# EAGLE board 3.3v_regMod_AAT1217_pnl (EAGLE 8.0.1)
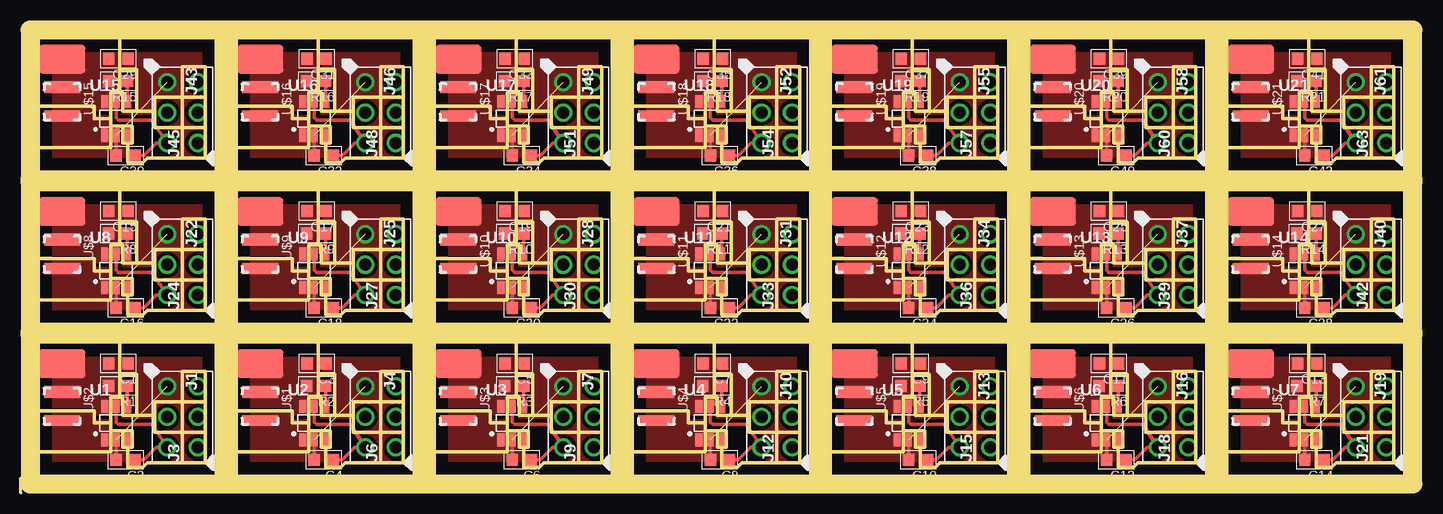
[diagram p0: board, top side]

Size 115.24 x 37.87 mm. Coordinates in mm from the lower left corner, seen from the top.
Outline: 0,0 16.18,0 16.18,12.47 0,12.47 0,0
Outline: 16.51,0 32.69,0 32.69,12.47 16.51,12.47 16.51,0
Outline: 33.02,0 49.2,0 49.2,12.47 33.02,12.47 33.02,0
Outline: 49.53,0 65.71,0 65.71,12.47 49.53,12.47 49.53,0
Outline: 66.04,0 82.22,0 82.22,12.47 66.04,12.47 66.04,0
Outline: 82.55,0 98.73,0 98.73,12.47 82.55,12.47 82.55,0
Outline: 99.06,0 115.24,0 115.24,12.47 99.06,12.47 99.06,0
Outline: 0,12.7 16.18,12.7 16.18,25.17 0,25.17 0,12.7
Outline: 16.51,12.7 32.69,12.7 32.69,25.17 16.51,25.17 16.51,12.7
Outline: 33.02,12.7 49.2,12.7 49.2,25.17 33.02,25.17 33.02,12.7
Outline: 49.53,12.7 65.71,12.7 65.71,25.17 49.53,25.17 49.53,12.7
Outline: 66.04,12.7 82.22,12.7 82.22,25.17 66.04,25.17 66.04,12.7
Outline: 82.55,12.7 98.73,12.7 98.73,25.17 82.55,25.17 82.55,12.7
Outline: 99.06,12.7 115.24,12.7 115.24,25.17 99.06,25.17 99.06,12.7
Outline: 0,25.4 16.18,25.4 16.18,37.87 0,37.87 0,25.4
Outline: 16.51,25.4 32.69,25.4 32.69,37.87 16.51,37.87 16.51,25.4
Outline: 33.02,25.4 49.2,25.4 49.2,37.87 33.02,37.87 33.02,25.4
Outline: 49.53,25.4 65.71,25.4 65.71,37.87 49.53,37.87 49.53,25.4
Outline: 66.04,25.4 82.22,25.4 82.22,37.87 66.04,37.87 66.04,25.4
Outline: 82.55,25.4 98.73,25.4 98.73,37.87 82.55,37.87 82.55,25.4
Outline: 99.06,25.4 115.24,25.4 115.24,37.87 99.06,37.87 99.06,25.4
Copper layers (1*16): Top 0.035mm / dielectric 1.5mm / Bottom 0.035mm
Design rules "default": minimum track width 10mil, minimum drill 24mil, track to track 8mil, track to pad 8mil, pad to pad 8mil, via to via 8mil, smd to smd 8mil, copper to edge 40mil, drill to drill 8mil, minimum pad ring 10mil, minimum via ring 8mil, stop-mask expansion 4mil, vias tented up to drill 0mil, thermal gap 10mil
Milling: 841 lines

## Footprints (pad centres in the part's own frame; a part is rotated, then mirrored left to right if it is on the bottom)
C0603-N = smd 0.95 x 1: 1 -0.8,0; 2 0.8,0
PTH_2.54MM_01X03 = drill 1: P$1 -2.54,0; P$2 0,0; P$3 2.54,0
1X01_LUXEON-PAD = smd 3.9 x 2.4: P$1 0,0
R0603-N = smd 0.95 x 1: 1 -0.8,0; 2 0.8,0
SOT23-6 = smd 0.6 x 1.1: 1 0,0; 2 0.95,0; 3 1.9,0; 4 1.9,2.8; 5 0.95,2.8; 6 0,2.8
L3030 = smd 1 x 3: P$1 -1.2,0 | smd 0.9 x 3: P$2 1.2,0

## Placement (x,y rotation side)
C1  [C0603-N]  7.37,10.06 180 top
C2  [C0603-N]  7.97,2 180 top
C3  [C0603-N]  23.88,10.06 180 top
C4  [C0603-N]  24.48,2 180 top
C5  [C0603-N]  40.39,10.06 180 top
C6  [C0603-N]  40.99,2 180 top
C7  [C0603-N]  56.9,10.06 180 top
C8  [C0603-N]  57.5,2 180 top
C9  [C0603-N]  73.41,10.06 180 top
C10  [C0603-N]  74.01,2 180 top
C11  [C0603-N]  89.92,10.06 180 top
C12  [C0603-N]  90.52,2 180 top
C13  [C0603-N]  106.43,10.06 180 top
C14  [C0603-N]  107.03,2 180 top
C15  [C0603-N]  7.37,22.76 180 top
C16  [C0603-N]  7.97,14.7 180 top
C17  [C0603-N]  23.88,22.76 180 top
C18  [C0603-N]  24.48,14.7 180 top
C19  [C0603-N]  40.39,22.76 180 top
C20  [C0603-N]  40.99,14.7 180 top
C21  [C0603-N]  56.9,22.76 180 top
C22  [C0603-N]  57.5,14.7 180 top
C23  [C0603-N]  73.41,22.76 180 top
C24  [C0603-N]  74.01,14.7 180 top
C25  [C0603-N]  89.92,22.76 180 top
C26  [C0603-N]  90.52,14.7 180 top
C27  [C0603-N]  106.43,22.76 180 top
C28  [C0603-N]  107.03,14.7 180 top
C29  [C0603-N]  7.37,35.46 180 top
C30  [C0603-N]  7.97,27.4 180 top
C31  [C0603-N]  23.88,35.46 180 top
C32  [C0603-N]  24.48,27.4 180 top
C33  [C0603-N]  40.39,35.46 180 top
C34  [C0603-N]  40.99,27.4 180 top
C35  [C0603-N]  56.9,35.46 180 top
C36  [C0603-N]  57.5,27.4 180 top
C37  [C0603-N]  73.41,35.46 180 top
C38  [C0603-N]  74.01,27.4 180 top
C39  [C0603-N]  89.92,35.46 180 top
C40  [C0603-N]  90.52,27.4 180 top
C41  [C0603-N]  106.43,35.46 180 top
C42  [C0603-N]  107.03,27.4 180 top
J1  MF-CON-2.54mm-01x03  [PTH_2.54MM_01X03]  11.43,5.59 270 top
J2  CON_01X01LUX  [1X01_LUXEON-PAD]  2.67,10.03 0 top
J3  MF-CON-2.54mm-01x03  [PTH_2.54MM_01X03]  13.97,5.59 90 top
J4  MF-CON-2.54mm-01x03  [PTH_2.54MM_01X03]  27.94,5.59 270 top
J5  CON_01X01LUX  [1X01_LUXEON-PAD]  19.18,10.03 0 top
J6  MF-CON-2.54mm-01x03  [PTH_2.54MM_01X03]  30.48,5.59 90 top
J7  MF-CON-2.54mm-01x03  [PTH_2.54MM_01X03]  44.45,5.59 270 top
J8  CON_01X01LUX  [1X01_LUXEON-PAD]  35.69,10.03 0 top
J9  MF-CON-2.54mm-01x03  [PTH_2.54MM_01X03]  46.99,5.59 90 top
J10  MF-CON-2.54mm-01x03  [PTH_2.54MM_01X03]  60.96,5.59 270 top
J11  CON_01X01LUX  [1X01_LUXEON-PAD]  52.2,10.03 0 top
J12  MF-CON-2.54mm-01x03  [PTH_2.54MM_01X03]  63.5,5.59 90 top
J13  MF-CON-2.54mm-01x03  [PTH_2.54MM_01X03]  77.47,5.59 270 top
J14  CON_01X01LUX  [1X01_LUXEON-PAD]  68.71,10.03 0 top
J15  MF-CON-2.54mm-01x03  [PTH_2.54MM_01X03]  80.01,5.59 90 top
J16  MF-CON-2.54mm-01x03  [PTH_2.54MM_01X03]  93.98,5.59 270 top
J17  CON_01X01LUX  [1X01_LUXEON-PAD]  85.22,10.03 0 top
J18  MF-CON-2.54mm-01x03  [PTH_2.54MM_01X03]  96.52,5.59 90 top
J19  MF-CON-2.54mm-01x03  [PTH_2.54MM_01X03]  110.49,5.59 270 top
J20  CON_01X01LUX  [1X01_LUXEON-PAD]  101.73,10.03 0 top
J21  MF-CON-2.54mm-01x03  [PTH_2.54MM_01X03]  113.03,5.59 90 top
J22  MF-CON-2.54mm-01x03  [PTH_2.54MM_01X03]  11.43,18.29 270 top
J23  CON_01X01LUX  [1X01_LUXEON-PAD]  2.67,22.73 0 top
J24  MF-CON-2.54mm-01x03  [PTH_2.54MM_01X03]  13.97,18.29 90 top
J25  MF-CON-2.54mm-01x03  [PTH_2.54MM_01X03]  27.94,18.29 270 top
J26  CON_01X01LUX  [1X01_LUXEON-PAD]  19.18,22.73 0 top
J27  MF-CON-2.54mm-01x03  [PTH_2.54MM_01X03]  30.48,18.29 90 top
J28  MF-CON-2.54mm-01x03  [PTH_2.54MM_01X03]  44.45,18.29 270 top
J29  CON_01X01LUX  [1X01_LUXEON-PAD]  35.69,22.73 0 top
J30  MF-CON-2.54mm-01x03  [PTH_2.54MM_01X03]  46.99,18.29 90 top
J31  MF-CON-2.54mm-01x03  [PTH_2.54MM_01X03]  60.96,18.29 270 top
J32  CON_01X01LUX  [1X01_LUXEON-PAD]  52.2,22.73 0 top
J33  MF-CON-2.54mm-01x03  [PTH_2.54MM_01X03]  63.5,18.29 90 top
J34  MF-CON-2.54mm-01x03  [PTH_2.54MM_01X03]  77.47,18.29 270 top
J35  CON_01X01LUX  [1X01_LUXEON-PAD]  68.71,22.73 0 top
J36  MF-CON-2.54mm-01x03  [PTH_2.54MM_01X03]  80.01,18.29 90 top
J37  MF-CON-2.54mm-01x03  [PTH_2.54MM_01X03]  93.98,18.29 270 top
J38  CON_01X01LUX  [1X01_LUXEON-PAD]  85.22,22.73 0 top
J39  MF-CON-2.54mm-01x03  [PTH_2.54MM_01X03]  96.52,18.29 90 top
J40  MF-CON-2.54mm-01x03  [PTH_2.54MM_01X03]  110.49,18.29 270 top
J41  CON_01X01LUX  [1X01_LUXEON-PAD]  101.73,22.73 0 top
J42  MF-CON-2.54mm-01x03  [PTH_2.54MM_01X03]  113.03,18.29 90 top
J43  MF-CON-2.54mm-01x03  [PTH_2.54MM_01X03]  11.43,30.99 270 top
J44  CON_01X01LUX  [1X01_LUXEON-PAD]  2.67,35.43 0 top
J45  MF-CON-2.54mm-01x03  [PTH_2.54MM_01X03]  13.97,30.99 90 top
J46  MF-CON-2.54mm-01x03  [PTH_2.54MM_01X03]  27.94,30.99 270 top
J47  CON_01X01LUX  [1X01_LUXEON-PAD]  19.18,35.43 0 top
J48  MF-CON-2.54mm-01x03  [PTH_2.54MM_01X03]  30.48,30.99 90 top
J49  MF-CON-2.54mm-01x03  [PTH_2.54MM_01X03]  44.45,30.99 270 top
J50  CON_01X01LUX  [1X01_LUXEON-PAD]  35.69,35.43 0 top
J51  MF-CON-2.54mm-01x03  [PTH_2.54MM_01X03]  46.99,30.99 90 top
J52  MF-CON-2.54mm-01x03  [PTH_2.54MM_01X03]  60.96,30.99 270 top
J53  CON_01X01LUX  [1X01_LUXEON-PAD]  52.2,35.43 0 top
J54  MF-CON-2.54mm-01x03  [PTH_2.54MM_01X03]  63.5,30.99 90 top
J55  MF-CON-2.54mm-01x03  [PTH_2.54MM_01X03]  77.47,30.99 270 top
J56  CON_01X01LUX  [1X01_LUXEON-PAD]  68.71,35.43 0 top
J57  MF-CON-2.54mm-01x03  [PTH_2.54MM_01X03]  80.01,30.99 90 top
J58  MF-CON-2.54mm-01x03  [PTH_2.54MM_01X03]  93.98,30.99 270 top
J59  CON_01X01LUX  [1X01_LUXEON-PAD]  85.22,35.43 0 top
J60  MF-CON-2.54mm-01x03  [PTH_2.54MM_01X03]  96.52,30.99 90 top
J61  MF-CON-2.54mm-01x03  [PTH_2.54MM_01X03]  110.49,30.99 270 top
J62  CON_01X01LUX  [1X01_LUXEON-PAD]  101.73,35.43 0 top
J63  MF-CON-2.54mm-01x03  [PTH_2.54MM_01X03]  113.03,30.99 90 top
R1  1M  [R0603-N]  7.33,8.19 180 top
R2  1M  [R0603-N]  23.84,8.19 180 top
R3  1M  [R0603-N]  40.35,8.19 180 top
R4  1M  [R0603-N]  56.86,8.19 180 top
R5  1M  [R0603-N]  73.37,8.19 180 top
R6  1M  [R0603-N]  89.88,8.19 180 top
R7  1M  [R0603-N]  106.39,8.19 180 top
R8  1M  [R0603-N]  7.33,20.89 180 top
R9  1M  [R0603-N]  23.84,20.89 180 top
R10  1M  [R0603-N]  40.35,20.89 180 top
R11  1M  [R0603-N]  56.86,20.89 180 top
R12  1M  [R0603-N]  73.37,20.89 180 top
R13  1M  [R0603-N]  89.88,20.89 180 top
R14  1M  [R0603-N]  106.39,20.89 180 top
R15  1M  [R0603-N]  7.33,33.59 180 top
R16  1M  [R0603-N]  23.84,33.59 180 top
R17  1M  [R0603-N]  40.35,33.59 180 top
R18  1M  [R0603-N]  56.86,33.59 180 top
R19  1M  [R0603-N]  73.37,33.59 180 top
R20  1M  [R0603-N]  89.88,33.59 180 top
R21  1M  [R0603-N]  106.39,33.59 180 top
U1  AAT1217-SOT23-6  [SOT23-6]  6.22,3.68 0 top
U2  AAT1217-SOT23-6  [SOT23-6]  22.73,3.68 0 top
U3  AAT1217-SOT23-6  [SOT23-6]  39.24,3.68 0 top
U4  AAT1217-SOT23-6  [SOT23-6]  55.75,3.68 0 top
U5  AAT1217-SOT23-6  [SOT23-6]  72.26,3.68 0 top
U6  AAT1217-SOT23-6  [SOT23-6]  88.77,3.68 0 top
U7  AAT1217-SOT23-6  [SOT23-6]  105.28,3.68 0 top
U8  AAT1217-SOT23-6  [SOT23-6]  6.22,16.38 0 top
U9  AAT1217-SOT23-6  [SOT23-6]  22.73,16.38 0 top
U10  AAT1217-SOT23-6  [SOT23-6]  39.24,16.38 0 top
U11  AAT1217-SOT23-6  [SOT23-6]  55.75,16.38 0 top
U12  AAT1217-SOT23-6  [SOT23-6]  72.26,16.38 0 top
U13  AAT1217-SOT23-6  [SOT23-6]  88.77,16.38 0 top
U14  AAT1217-SOT23-6  [SOT23-6]  105.28,16.38 0 top
U15  AAT1217-SOT23-6  [SOT23-6]  6.22,29.08 0 top
U16  AAT1217-SOT23-6  [SOT23-6]  22.73,29.08 0 top
U17  AAT1217-SOT23-6  [SOT23-6]  39.24,29.08 0 top
U18  AAT1217-SOT23-6  [SOT23-6]  55.75,29.08 0 top
U19  AAT1217-SOT23-6  [SOT23-6]  72.26,29.08 0 top
U20  AAT1217-SOT23-6  [SOT23-6]  88.77,29.08 0 top
U21  AAT1217-SOT23-6  [SOT23-6]  105.28,29.08 0 top
U$1  [L3030]  19.18,6.48 270 top
U$2  [L3030]  2.67,6.48 270 top
U$3  [L3030]  35.69,6.48 270 top
U$4  [L3030]  52.2,6.48 270 top
U$5  [L3030]  68.71,6.48 270 top
U$6  [L3030]  85.22,6.48 270 top
U$7  [L3030]  101.73,6.48 270 top
U$8  [L3030]  2.67,19.18 270 top
U$9  [L3030]  19.18,19.18 270 top
U$10  [L3030]  35.69,19.18 270 top
U$11  [L3030]  52.2,19.18 270 top
U$12  [L3030]  68.71,19.18 270 top
U$13  [L3030]  85.22,19.18 270 top
U$14  [L3030]  101.73,19.18 270 top
U$15  [L3030]  2.67,31.88 270 top
U$16  [L3030]  19.18,31.88 270 top
U$17  [L3030]  35.69,31.88 270 top
U$18  [L3030]  52.2,31.88 270 top
U$19  [L3030]  68.71,31.88 270 top
U$20  [L3030]  85.22,31.88 270 top
U$21  [L3030]  101.73,31.88 270 top

## Library data of the parts
C1-C42 R1-R21 U$1-U$21 = My_Passives
J1 J3 J4 J6 J7 J9 J10 J12 J13 J15 J16 J18 J19 J21 J22 J24 J25 J27 J28 J30 J31 J33 J34 J36 J37 J39 J40 J42 J43 J45 J46 J48 J49 J51 J52 J54 J55 J57 J58 J60 J61 J63 = My_Connectors; HOUSEPART: YES; MPN: MF-CON-2.54mm-01x03; POPULATE: 1; URL: https://factory.macrofab.com/part/MF-CON-2.54mm-01x03
J2 J5 J8 J11 J14 J17 J20 J23 J26 J29 J32 J35 J38 J41 J44 J47 J50 J53 J56 J59 J62 = My_Connectors
U1-U21 = My_IC_Power; PARTNO: AAT1217ICA-3.3-T1

## Nets
3V1: C4.1 J4.P$3 U2.5
3V2: C6.1 J7.P$3 U3.5
3V3: C2.1 J1.P$3 U1.5
3V4: C8.1 J10.P$3 U4.5
3V5: C10.1 J13.P$3 U5.5
3V6: C12.1 J16.P$3 U6.5
3V7: C14.1 J19.P$3 U7.5
3V8: C16.1 J22.P$3 U8.5
3V9: C18.1 J25.P$3 U9.5
3V10: C20.1 J28.P$3 U10.5
3V11: C22.1 J31.P$3 U11.5
3V12: C24.1 J34.P$3 U12.5
3V13: C26.1 J37.P$3 U13.5
3V14: C28.1 J40.P$3 U14.5
3V15: C30.1 J43.P$3 U15.5
3V16: C32.1 J46.P$3 U16.5
3V17: C34.1 J49.P$3 U17.5
3V18: C36.1 J52.P$3 U18.5
3V19: C38.1 J55.P$3 U19.5
3V20: C40.1 J58.P$3 U20.5
3V21: C42.1 J61.P$3 U21.5
GND: C1.1 C2.2 J1.P$1 U1.2
GND1: C3.1 C4.2 J4.P$1 U2.2
GND2: C5.1 C6.2 J7.P$1 U3.2
GND3: C7.1 C8.2 J10.P$1 U4.2
GND4: C9.1 C10.2 J13.P$1 U5.2
GND5: C11.1 C12.2 J16.P$1 U6.2
GND6: C13.1 C14.2 J19.P$1 U7.2
GND7: C15.1 C16.2 J22.P$1 U8.2
GND8: C17.1 C18.2 J25.P$1 U9.2
GND9: C19.1 C20.2 J28.P$1 U10.2
GND10: C21.1 C22.2 J31.P$1 U11.2
GND11: C23.1 C24.2 J34.P$1 U12.2
GND12: C25.1 C26.2 J37.P$1 U13.2
GND13: C27.1 C28.2 J40.P$1 U14.2
GND14: C29.1 C30.2 J43.P$1 U15.2
GND15: C31.1 C32.2 J46.P$1 U16.2
GND16: C33.1 C34.2 J49.P$1 U17.2
GND17: C35.1 C36.2 J52.P$1 U18.2
GND18: C37.1 C38.2 J55.P$1 U19.2
GND19: C39.1 C40.2 J58.P$1 U20.2
GND20: C41.1 C42.2 J61.P$1 U21.2
N$1: U1.1 U$2.P$2
N$2: U2.1 U$1.P$2
N$3: R1.1 U1.4
N$4: R2.1 U2.4
N$5: U3.1 U$3.P$2
N$6: R3.1 U3.4
N$7: U4.1 U$4.P$2
N$8: R4.1 U4.4
N$9: U5.1 U$5.P$2
N$10: R5.1 U5.4
N$11: U6.1 U$6.P$2
N$12: R6.1 U6.4
N$13: U7.1 U$7.P$2
N$14: R7.1 U7.4
N$15: U8.1 U$8.P$2
N$16: R8.1 U8.4
N$17: U9.1 U$9.P$2
N$18: R9.1 U9.4
N$19: U10.1 U$10.P$2
N$20: R10.1 U10.4
N$21: U11.1 U$11.P$2
N$22: R11.1 U11.4
N$23: U12.1 U$12.P$2
N$24: R12.1 U12.4
N$25: U13.1 U$13.P$2
N$26: R13.1 U13.4
N$27: U14.1 U$14.P$2
N$28: R14.1 U14.4
N$29: U15.1 U$15.P$2
N$30: R15.1 U15.4
N$31: U16.1 U$16.P$2
N$32: R16.1 U16.4
N$33: U17.1 U$17.P$2
N$34: R17.1 U17.4
N$35: U18.1 U$18.P$2
N$36: R18.1 U18.4
N$37: U19.1 U$19.P$2
N$38: R19.1 U19.4
N$39: U20.1 U$20.P$2
N$40: R20.1 U20.4
N$41: U21.1 U$21.P$2
N$42: R21.1 U21.4
V_BAT: C1.2 J2.P$1 R1.2 U1.6 U$2.P$1
V_BAT1: C3.2 J5.P$1 R2.2 U2.6 U$1.P$1
V_BAT2: C5.2 J8.P$1 R3.2 U3.6 U$3.P$1
V_BAT3: C7.2 J11.P$1 R4.2 U4.6 U$4.P$1
V_BAT4: C9.2 J14.P$1 R5.2 U5.6 U$5.P$1
V_BAT5: C11.2 J17.P$1 R6.2 U6.6 U$6.P$1
V_BAT6: C13.2 J20.P$1 R7.2 U7.6 U$7.P$1
V_BAT7: C15.2 J23.P$1 R8.2 U8.6 U$8.P$1
V_BAT8: C17.2 J26.P$1 R9.2 U9.6 U$9.P$1
V_BAT9: C19.2 J29.P$1 R10.2 U10.6 U$10.P$1
V_BAT10: C21.2 J32.P$1 R11.2 U11.6 U$11.P$1
V_BAT11: C23.2 J35.P$1 R12.2 U12.6 U$12.P$1
V_BAT12: C25.2 J38.P$1 R13.2 U13.6 U$13.P$1
V_BAT13: C27.2 J41.P$1 R14.2 U14.6 U$14.P$1
V_BAT14: C29.2 J44.P$1 R15.2 U15.6 U$15.P$1
V_BAT15: C31.2 J47.P$1 R16.2 U16.6 U$16.P$1
V_BAT16: C33.2 J50.P$1 R17.2 U17.6 U$17.P$1
V_BAT17: C35.2 J53.P$1 R18.2 U18.6 U$18.P$1
V_BAT18: C37.2 J56.P$1 R19.2 U19.6 U$19.P$1
V_BAT19: C39.2 J59.P$1 R20.2 U20.6 U$20.P$1
V_BAT20: C41.2 J62.P$1 R21.2 U21.6 U$21.P$1

## Tracks (layer width: path | path; a pad name or v marks a point on that pad's centre or on a via)
3V1
  Top 0.305: U2.5 23.68,5.15 23.88,4.95 26.67,4.95 J4.P$3 27.05,3.05 26,2 C4.1
3V2
  Top 0.305: U3.5 40.19,5.15 40.39,4.95 43.18,4.95 J7.P$3 43.56,3.05 42.51,2 C6.1
3V3
  Top 0.305: U1.5 7.17,5.15 7.37,4.95 10.16,4.95 J1.P$3 10.54,3.05 9.49,2 C2.1
3V4
  Top 0.305: U4.5 56.7,5.15 56.9,4.95 59.69,4.95 J10.P$3 60.07,3.05 59.02,2 C8.1
3V5
  Top 0.305: U5.5 73.21,5.15 73.41,4.95 76.2,4.95 J13.P$3 76.58,3.05 75.53,2 C10.1
3V6
  Top 0.305: U6.5 89.72,5.15 89.92,4.95 92.71,4.95 J16.P$3 93.09,3.05 92.04,2 C12.1
3V7
  Top 0.305: U7.5 106.23,5.15 106.43,4.95 109.22,4.95 J19.P$3 109.6,3.05 108.55,2 C14.1
3V8
  Top 0.305: U8.5 7.17,17.85 7.37,17.65 10.16,17.65 J22.P$3 10.54,15.75 9.49,14.7 C16.1
3V9
  Top 0.305: U9.5 23.68,17.85 23.88,17.65 26.67,17.65 J25.P$3 27.05,15.75 26,14.7 C18.1
3V10
  Top 0.305: U10.5 40.19,17.85 40.39,17.65 43.18,17.65 J28.P$3 43.56,15.75 42.51,14.7 C20.1
3V11
  Top 0.305: U11.5 56.7,17.85 56.9,17.65 59.69,17.65 J31.P$3 60.07,15.75 59.02,14.7 C22.1
3V12
  Top 0.305: U12.5 73.21,17.85 73.41,17.65 76.2,17.65 J34.P$3 76.58,15.75 75.53,14.7 C24.1
3V13
  Top 0.305: U13.5 89.72,17.85 89.92,17.65 92.71,17.65 J37.P$3 93.09,15.75 92.04,14.7 C26.1
3V14
  Top 0.305: U14.5 106.23,17.85 106.43,17.65 109.22,17.65 J40.P$3 109.6,15.75 108.55,14.7 C28.1
3V15
  Top 0.305: U15.5 7.17,30.55 7.37,30.35 10.16,30.35 J43.P$3 10.54,28.45 9.49,27.4 C30.1
3V16
  Top 0.305: U16.5 23.68,30.55 23.88,30.35 26.67,30.35 J46.P$3 27.05,28.45 26,27.4 C32.1
3V17
  Top 0.305: U17.5 40.19,30.55 40.39,30.35 43.18,30.35 J49.P$3 43.56,28.45 42.51,27.4 C34.1
3V18
  Top 0.305: U18.5 56.7,30.55 56.9,30.35 59.69,30.35 J52.P$3 60.07,28.45 59.02,27.4 C36.1
3V19
  Top 0.305: U19.5 73.21,30.55 73.41,30.35 76.2,30.35 J55.P$3 76.58,28.45 75.53,27.4 C38.1
3V20
  Top 0.305: U20.5 89.72,30.55 89.92,30.35 92.71,30.35 J58.P$3 93.09,28.45 92.04,27.4 C40.1
3V21
  Top 0.305: U21.5 106.23,30.55 106.43,30.35 109.22,30.35 J61.P$3 109.6,28.45 108.55,27.4 C42.1
GND  (1 unrouted)
  Top 0.305: U1.2 C2.2
  pour Top (isolate 0.305, rank 6, no thermals): 0.51,0.51 15.37,0.51 15.37,11.43 0.51,11.43
GND1  (1 unrouted)
  Top 0.305: U2.2 C4.2
  pour Top (isolate 0.305, rank 6, no thermals): 17.02,0.51 31.88,0.51 31.88,11.43 17.02,11.43
GND2  (1 unrouted)
  Top 0.305: U3.2 C6.2
  pour Top (isolate 0.305, rank 6, no thermals): 33.53,0.51 48.39,0.51 48.39,11.43 33.53,11.43
GND3  (1 unrouted)
  Top 0.305: U4.2 C8.2
  pour Top (isolate 0.305, rank 6, no thermals): 50.04,0.51 64.9,0.51 64.9,11.43 50.04,11.43
GND4  (1 unrouted)
  Top 0.305: U5.2 C10.2
  pour Top (isolate 0.305, rank 6, no thermals): 66.55,0.51 81.41,0.51 81.41,11.43 66.55,11.43
GND5  (1 unrouted)
  Top 0.305: U6.2 C12.2
  pour Top (isolate 0.305, rank 6, no thermals): 83.06,0.51 97.92,0.51 97.92,11.43 83.06,11.43
GND6  (1 unrouted)
  Top 0.305: U7.2 C14.2
  pour Top (isolate 0.305, rank 6, no thermals): 99.57,0.51 114.43,0.51 114.43,11.43 99.57,11.43
GND7  (1 unrouted)
  Top 0.305: U8.2 C16.2
  pour Top (isolate 0.305, rank 6, no thermals): 0.51,13.21 15.37,13.21 15.37,24.13 0.51,24.13
GND8  (1 unrouted)
  Top 0.305: U9.2 C18.2
  pour Top (isolate 0.305, rank 6, no thermals): 17.02,13.21 31.88,13.21 31.88,24.13 17.02,24.13
GND9  (1 unrouted)
  Top 0.305: U10.2 C20.2
  pour Top (isolate 0.305, rank 6, no thermals): 33.53,13.21 48.39,13.21 48.39,24.13 33.53,24.13
GND10  (1 unrouted)
  Top 0.305: U11.2 C22.2
  pour Top (isolate 0.305, rank 6, no thermals): 50.04,13.21 64.9,13.21 64.9,24.13 50.04,24.13
GND11  (1 unrouted)
  Top 0.305: U12.2 C24.2
  pour Top (isolate 0.305, rank 6, no thermals): 66.55,13.21 81.41,13.21 81.41,24.13 66.55,24.13
GND12  (1 unrouted)
  Top 0.305: U13.2 C26.2
  pour Top (isolate 0.305, rank 6, no thermals): 83.06,13.21 97.92,13.21 97.92,24.13 83.06,24.13
GND13  (1 unrouted)
  Top 0.305: U14.2 C28.2
  pour Top (isolate 0.305, rank 6, no thermals): 99.57,13.21 114.43,13.21 114.43,24.13 99.57,24.13
GND14  (1 unrouted)
  Top 0.305: U15.2 C30.2
  pour Top (isolate 0.305, rank 6, no thermals): 0.51,25.91 15.37,25.91 15.37,36.83 0.51,36.83
GND15  (1 unrouted)
  Top 0.305: U16.2 C32.2
  pour Top (isolate 0.305, rank 6, no thermals): 17.02,25.91 31.88,25.91 31.88,36.83 17.02,36.83
GND16  (1 unrouted)
  Top 0.305: U17.2 C34.2
  pour Top (isolate 0.305, rank 6, no thermals): 33.53,25.91 48.39,25.91 48.39,36.83 33.53,36.83
GND17  (1 unrouted)
  Top 0.305: U18.2 C36.2
  pour Top (isolate 0.305, rank 6, no thermals): 50.04,25.91 64.9,25.91 64.9,36.83 50.04,36.83
GND18  (1 unrouted)
  Top 0.305: U19.2 C38.2
  pour Top (isolate 0.305, rank 6, no thermals): 66.55,25.91 81.41,25.91 81.41,36.83 66.55,36.83
GND19  (1 unrouted)
  Top 0.305: U20.2 C40.2
  pour Top (isolate 0.305, rank 6, no thermals): 83.06,25.91 97.92,25.91 97.92,36.83 83.06,36.83
GND20  (1 unrouted)
  Top 0.305: U21.2 C42.2
  pour Top (isolate 0.305, rank 6, no thermals): 99.57,25.91 114.43,25.91 114.43,36.83 99.57,36.83
N$1
  pour Top (isolate 0.305, rank 2, no thermals): 0.51,6.22 6.73,6.22 6.73,2.92 0.51,2.92
N$2
  pour Top (isolate 0.305, rank 2, no thermals): 17.02,6.22 23.24,6.22 23.24,2.92 17.02,2.92
N$3
  Top 0.305: U1.4 8.12,8.18 R1.1
N$4
  Top 0.305: U2.4 24.63,8.18 R2.1
N$5
  pour Top (isolate 0.305, rank 2, no thermals): 33.53,6.22 39.75,6.22 39.75,2.92 33.53,2.92
N$6
  Top 0.305: U3.4 41.14,8.18 R3.1
N$7
  pour Top (isolate 0.305, rank 2, no thermals): 50.04,6.22 56.26,6.22 56.26,2.92 50.04,2.92
N$8
  Top 0.305: U4.4 57.65,8.18 R4.1
N$9
  pour Top (isolate 0.305, rank 2, no thermals): 66.55,6.22 72.77,6.22 72.77,2.92 66.55,2.92
N$10
  Top 0.305: U5.4 74.16,8.18 R5.1
N$11
  pour Top (isolate 0.305, rank 2, no thermals): 83.06,6.22 89.28,6.22 89.28,2.92 83.06,2.92
N$12
  Top 0.305: U6.4 90.67,8.18 R6.1
N$13
  pour Top (isolate 0.305, rank 2, no thermals): 99.57,6.22 105.79,6.22 105.79,2.92 99.57,2.92
N$14
  Top 0.305: U7.4 107.18,8.18 R7.1
N$15
  pour Top (isolate 0.305, rank 2, no thermals): 0.51,18.92 6.73,18.92 6.73,15.62 0.51,15.62
N$16
  Top 0.305: U8.4 8.12,20.88 R8.1
N$17
  pour Top (isolate 0.305, rank 2, no thermals): 17.02,18.92 23.24,18.92 23.24,15.62 17.02,15.62
N$18
  Top 0.305: U9.4 24.63,20.88 R9.1
N$19
  pour Top (isolate 0.305, rank 2, no thermals): 33.53,18.92 39.75,18.92 39.75,15.62 33.53,15.62
N$20
  Top 0.305: U10.4 41.14,20.88 R10.1
N$21
  pour Top (isolate 0.305, rank 2, no thermals): 50.04,18.92 56.26,18.92 56.26,15.62 50.04,15.62
N$22
  Top 0.305: U11.4 57.65,20.88 R11.1
N$23
  pour Top (isolate 0.305, rank 2, no thermals): 66.55,18.92 72.77,18.92 72.77,15.62 66.55,15.62
N$24
  Top 0.305: U12.4 74.16,20.88 R12.1
N$25
  pour Top (isolate 0.305, rank 2, no thermals): 83.06,18.92 89.28,18.92 89.28,15.62 83.06,15.62
N$26
  Top 0.305: U13.4 90.67,20.88 R13.1
N$27
  pour Top (isolate 0.305, rank 2, no thermals): 99.57,18.92 105.79,18.92 105.79,15.62 99.57,15.62
N$28
  Top 0.305: U14.4 107.18,20.88 R14.1
N$29
  pour Top (isolate 0.305, rank 2, no thermals): 0.51,31.62 6.73,31.62 6.73,28.32 0.51,28.32
N$30
  Top 0.305: U15.4 8.12,33.58 R15.1
N$31
  pour Top (isolate 0.305, rank 2, no thermals): 17.02,31.62 23.24,31.62 23.24,28.32 17.02,28.32
N$32
  Top 0.305: U16.4 24.63,33.58 R16.1
N$33
  pour Top (isolate 0.305, rank 2, no thermals): 33.53,31.62 39.75,31.62 39.75,28.32 33.53,28.32
N$34
  Top 0.305: U17.4 41.14,33.58 R17.1
N$35
  pour Top (isolate 0.305, rank 2, no thermals): 50.04,31.62 56.26,31.62 56.26,28.32 50.04,28.32
N$36
  Top 0.305: U18.4 57.65,33.58 R18.1
N$37
  pour Top (isolate 0.305, rank 2, no thermals): 66.55,31.62 72.77,31.62 72.77,28.32 66.55,28.32
N$38
  Top 0.305: U19.4 74.16,33.58 R19.1
N$39
  pour Top (isolate 0.305, rank 2, no thermals): 83.06,31.62 89.28,31.62 89.28,28.32 83.06,28.32
N$40
  Top 0.305: U20.4 90.67,33.58 R20.1
N$41
  pour Top (isolate 0.305, rank 2, no thermals): 99.57,31.62 105.79,31.62 105.79,28.32 99.57,28.32
N$42
  Top 0.305: U21.4 107.18,33.58 R21.1
V_BAT
  pour Top (isolate 0.305, no thermals): 0.51,11.43 0.51,6.48 5.59,6.48 5.59,5.84 6.6,5.84 6.6,7.24 7.37,7.24 7.37,11.43
V_BAT1
  pour Top (isolate 0.305, no thermals): 17.02,11.43 17.02,6.48 22.1,6.48 22.1,5.84 23.11,5.84 23.11,7.24 23.88,7.24 23.88,11.43
V_BAT2
  pour Top (isolate 0.305, no thermals): 33.53,11.43 33.53,6.48 38.61,6.48 38.61,5.84 39.62,5.84 39.62,7.24 40.39,7.24 40.39,11.43
V_BAT3
  pour Top (isolate 0.305, no thermals): 50.04,11.43 50.04,6.48 55.12,6.48 55.12,5.84 56.13,5.84 56.13,7.24 56.9,7.24 56.9,11.43
V_BAT4
  pour Top (isolate 0.305, no thermals): 66.55,11.43 66.55,6.48 71.63,6.48 71.63,5.84 72.64,5.84 72.64,7.24 73.41,7.24 73.41,11.43
V_BAT5
  pour Top (isolate 0.305, no thermals): 83.06,11.43 83.06,6.48 88.14,6.48 88.14,5.84 89.15,5.84 89.15,7.24 89.92,7.24 89.92,11.43
V_BAT6
  pour Top (isolate 0.305, no thermals): 99.57,11.43 99.57,6.48 104.65,6.48 104.65,5.84 105.66,5.84 105.66,7.24 106.43,7.24 106.43,11.43
V_BAT7
  pour Top (isolate 0.305, no thermals): 0.51,24.13 0.51,19.18 5.59,19.18 5.59,18.54 6.6,18.54 6.6,19.94 7.37,19.94 7.37,24.13
V_BAT8
  pour Top (isolate 0.305, no thermals): 17.02,24.13 17.02,19.18 22.1,19.18 22.1,18.54 23.11,18.54 23.11,19.94 23.88,19.94 23.88,24.13
V_BAT9
  pour Top (isolate 0.305, no thermals): 33.53,24.13 33.53,19.18 38.61,19.18 38.61,18.54 39.62,18.54 39.62,19.94 40.39,19.94 40.39,24.13
V_BAT10
  pour Top (isolate 0.305, no thermals): 50.04,24.13 50.04,19.18 55.12,19.18 55.12,18.54 56.13,18.54 56.13,19.94 56.9,19.94 56.9,24.13
V_BAT11
  pour Top (isolate 0.305, no thermals): 66.55,24.13 66.55,19.18 71.63,19.18 71.63,18.54 72.64,18.54 72.64,19.94 73.41,19.94 73.41,24.13
V_BAT12
  pour Top (isolate 0.305, no thermals): 83.06,24.13 83.06,19.18 88.14,19.18 88.14,18.54 89.15,18.54 89.15,19.94 89.92,19.94 89.92,24.13
V_BAT13
  pour Top (isolate 0.305, no thermals): 99.57,24.13 99.57,19.18 104.65,19.18 104.65,18.54 105.66,18.54 105.66,19.94 106.43,19.94 106.43,24.13
V_BAT14
  pour Top (isolate 0.305, no thermals): 0.51,36.83 0.51,31.88 5.59,31.88 5.59,31.24 6.6,31.24 6.6,32.64 7.37,32.64 7.37,36.83
V_BAT15
  pour Top (isolate 0.305, no thermals): 17.02,36.83 17.02,31.88 22.1,31.88 22.1,31.24 23.11,31.24 23.11,32.64 23.88,32.64 23.88,36.83
V_BAT16
  pour Top (isolate 0.305, no thermals): 33.53,36.83 33.53,31.88 38.61,31.88 38.61,31.24 39.62,31.24 39.62,32.64 40.39,32.64 40.39,36.83
V_BAT17
  pour Top (isolate 0.305, no thermals): 50.04,36.83 50.04,31.88 55.12,31.88 55.12,31.24 56.13,31.24 56.13,32.64 56.9,32.64 56.9,36.83
V_BAT18
  pour Top (isolate 0.305, no thermals): 66.55,36.83 66.55,31.88 71.63,31.88 71.63,31.24 72.64,31.24 72.64,32.64 73.41,32.64 73.41,36.83
V_BAT19
  pour Top (isolate 0.305, no thermals): 83.06,36.83 83.06,31.88 88.14,31.88 88.14,31.24 89.15,31.24 89.15,32.64 89.92,32.64 89.92,36.83
V_BAT20
  pour Top (isolate 0.305, no thermals): 99.57,36.83 99.57,31.88 104.65,31.88 104.65,31.24 105.66,31.24 105.66,32.64 106.43,32.64 106.43,36.83